# Altium PCB servo.PcbDoc
Units mm, origin at the board's own origin, x right, y up, seen from the top; angles counter-clockwise.
Board outline 152.78 x 100.58 mm, 2 copper layers (Top Layer, Bottom Layer); 35 components, 27 nets, 134 pads, 0 vias.
Unrouted connection lines stored in the file: 4.
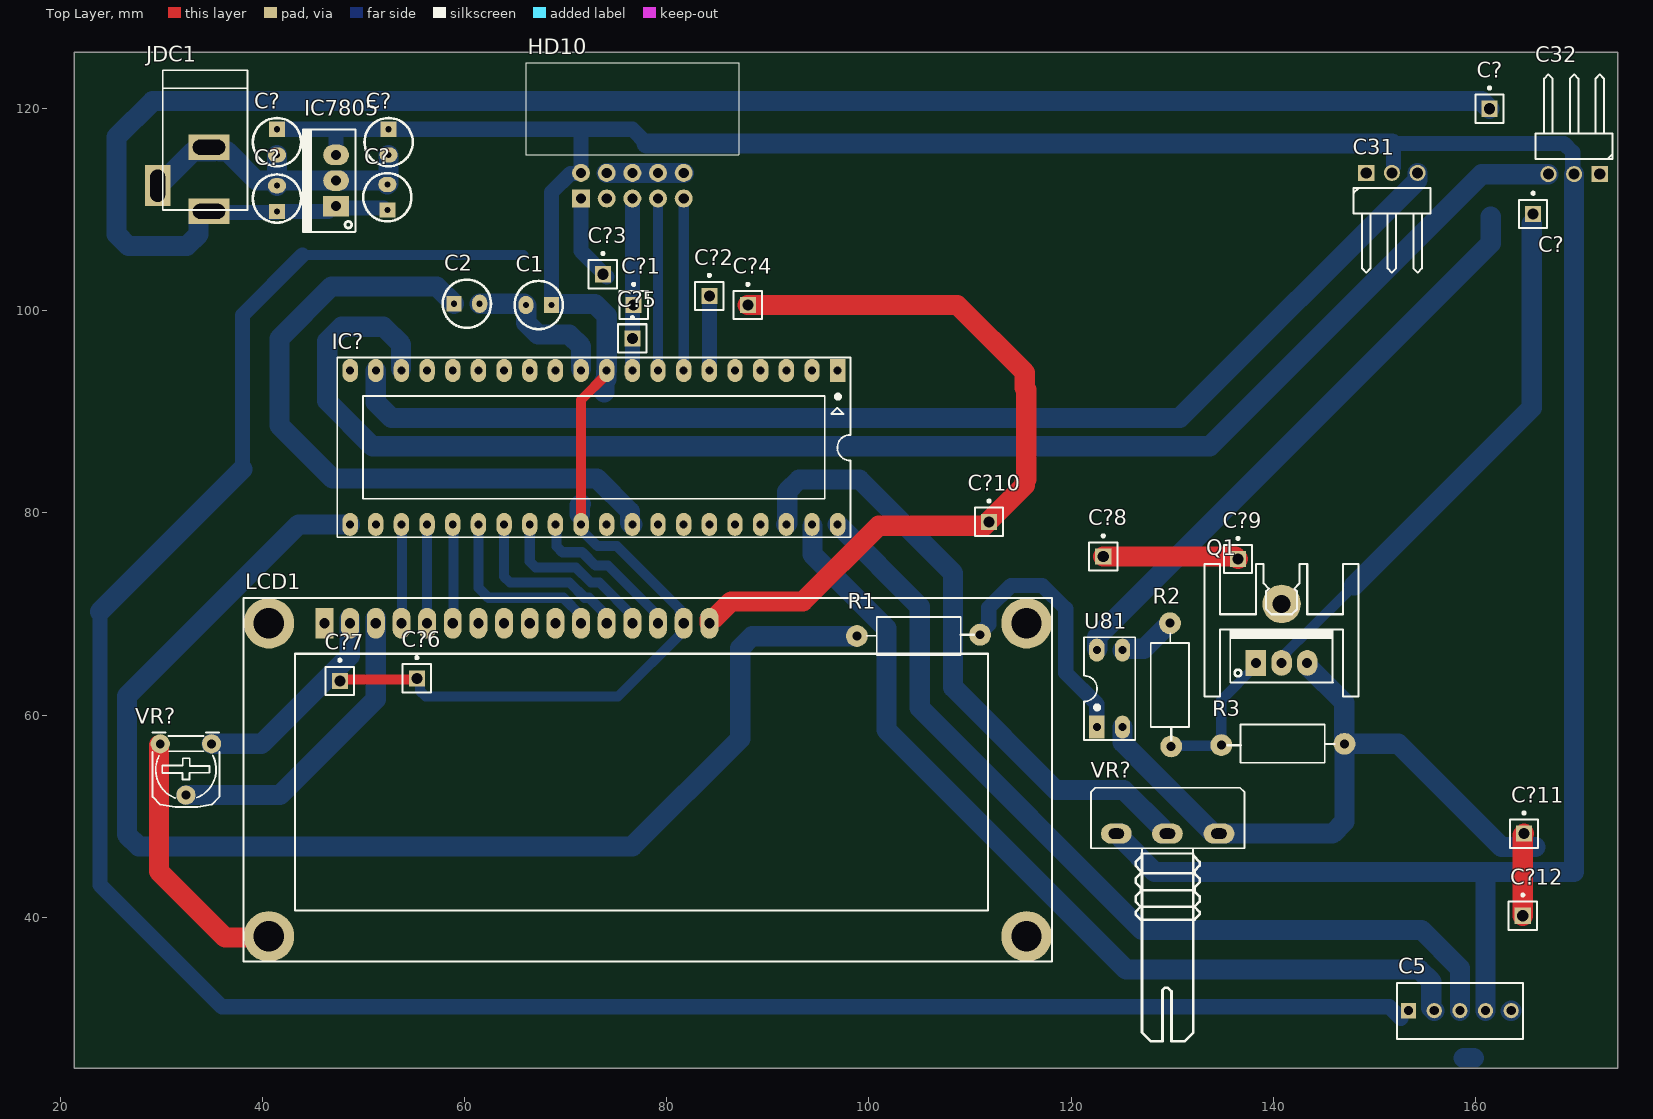
[diagram p0: Top Layer view]
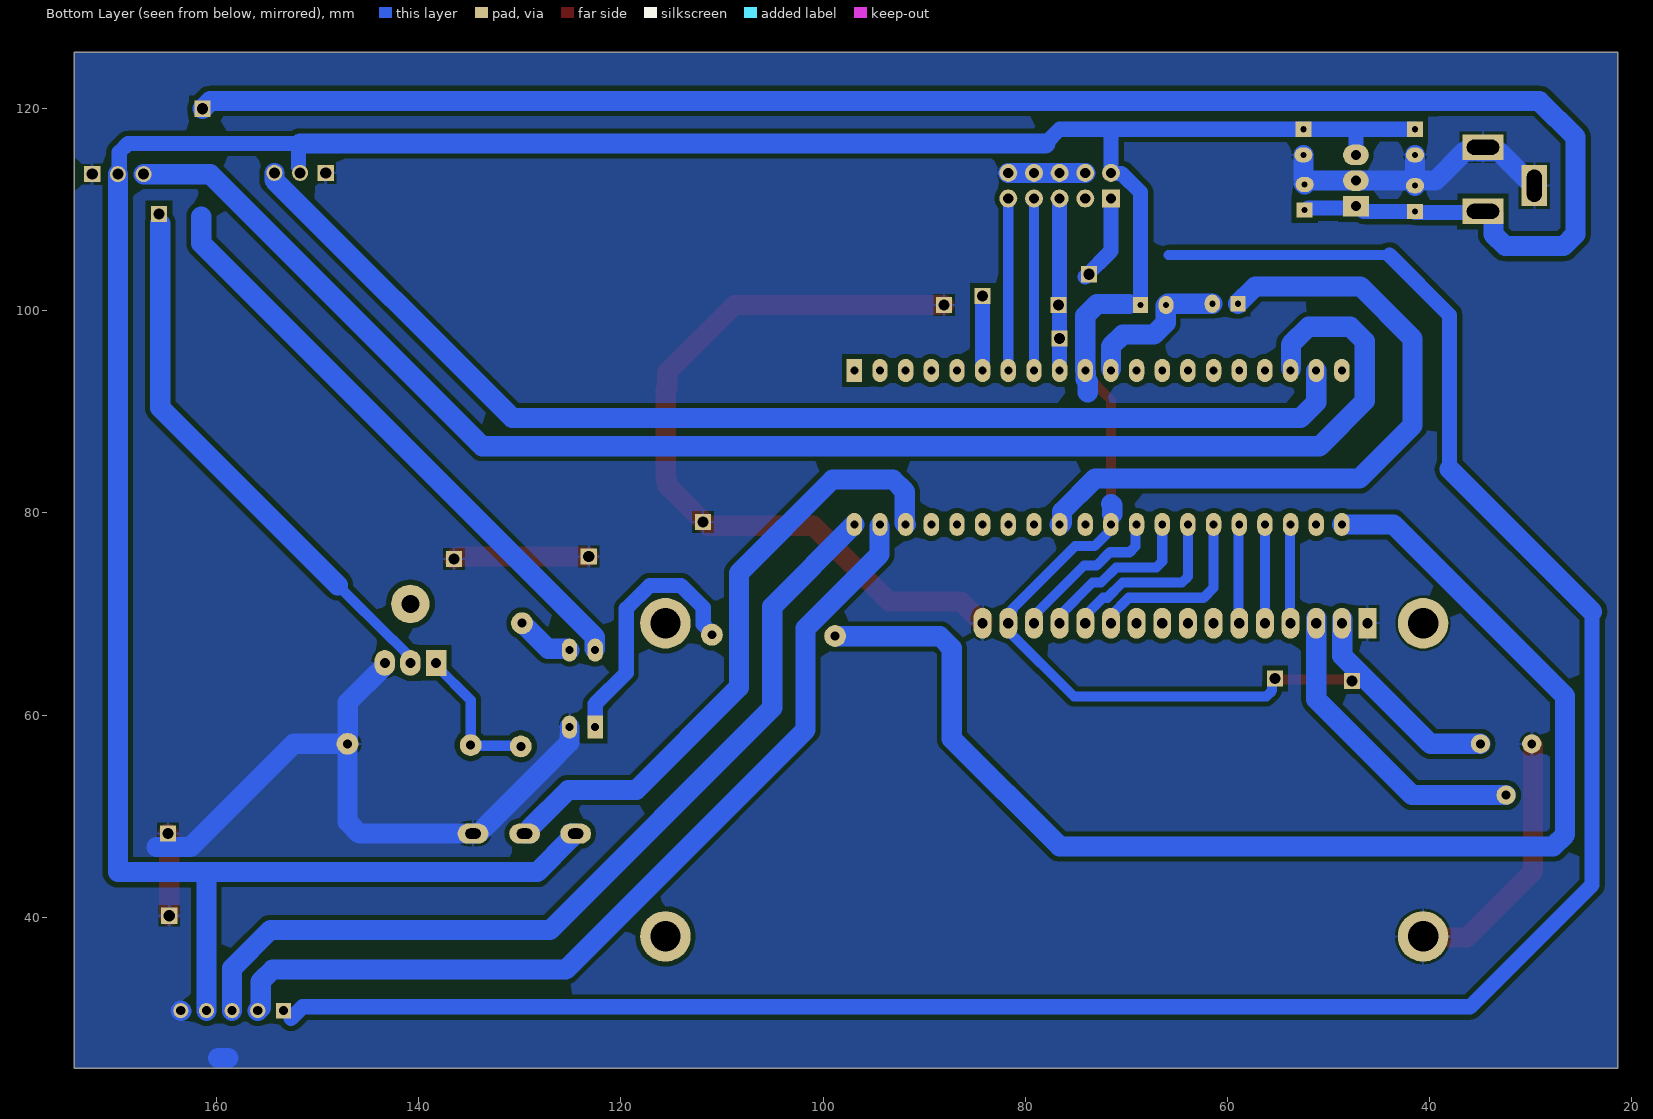
[diagram p1: Bottom Layer view, seen from below]
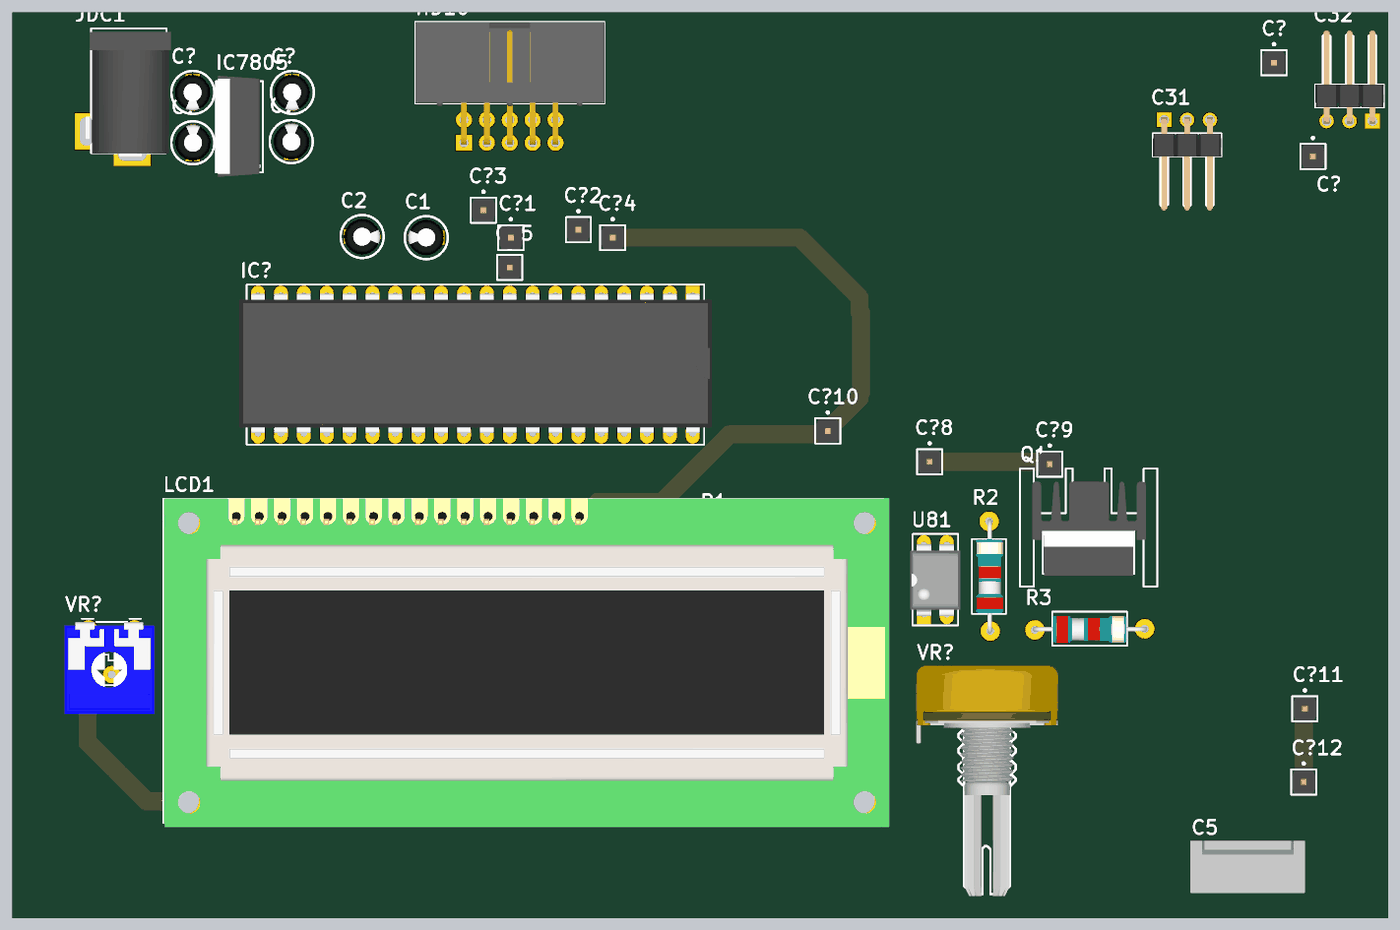
[diagram p2: 3D render of the assembled board from above, using the file's embedded part models]

## Layer stack, top to bottom
Top Solder: solder mask 0.0102, Solder Resist, Dk 3.5
Top Layer: signal copper 0.0356
Dielectric 1: dielectric 0.32, FR-4, Dk 4.8
Bottom Layer: signal copper 0.0356
Bottom Solder: solder mask 0.0102, Solder Resist, Dk 3.5

## Board outline
21.336,25.019 174.117,25.019 174.117,125.603 21.336,125.603

## Design rules (kind name [scope] priority, off if disabled: settings)
Clearance [All] p1: gap=0.5 ignorepadtopadclearanceinfootprint=FALSE
PolygonConnect [All] p1: connectstyle=Relief reliefconductorwidth=0.254 reliefentries=4 polygonreliefangle="90 Angle" airgapwidth=0.254
RoutingCorners [All] p1: cornerstyle=Round minsetback=2.54 maxsetback=2.54
RoutingVias [All] p1: holewidth=0.711 width=1.27 viastyle="Through Hole" minholewidth=0.711 minwidth=1.27 maxholewidth=0.711 maxwidth=1.27
ShortCircuit [All] p1: allowed=TRUE
SolderMaskExpansion [All] p1: expansion=0.102 istentingtop=FALSE
UnRoutedNet [All] p1: checkbadconnections=TRUE
Width [All] p1: maxlimit=5 minlimit=0.5 preferedwidth=0.7
27 further rules are at their usual default settings.

## Classes and differential pairs
component class servo: C1 C2 C5 C31 C32 C? HD10 IC7805 IC? JDC1 LCD1 Q1 R1 R2 R3 U81 VR?

## Components (designator, comment, footprint, x,y, rotation, side; value= is the part's Value field where it differs from the comment)
C1 "CN-ALU-DIP" CA-ALU-2.54 67.31,100.584 r180 top value=104
C2 "CN-ALU-DIP" CA-ALU-2.54 60.198,100.711 r0 top value=104
C5 "Header5" HDR5 153.416,30.734 r0 top
C31 "JP3" JP3-D1C 155.575,111.125 r0 top
C32 "JP3" JP3-D1C 165.989,116.078 r180 top
C? "CN-ALU-DIP" CA-ALU-2.54 52.324,111.252 r90 top value=104
C? "CN-ALU-DIP" CA-ALU-2.54 52.451,116.713 r270 top value=104
C? "JP1" JP1-D1T 165.735,109.601 r0 top
C? "JP1" JP1-D1T 161.417,120.015 r0 top
C? "CN-ALU-DIP" CA-ALU-2.54 41.402,111.125 r90 top value=104
C? "CN-ALU-DIP" CA-ALU-2.54 41.402,116.713 r270 top value=104
C?1 "JP1" JP1-D1T 76.708,100.584 r0 top (schematic designator C?)
C?2 "JP1" JP1-D1T 84.201,101.473 r0 top (schematic designator C?)
C?3 "JP1" JP1-D1T 73.66,103.632 r0 top (schematic designator C?)
C?4 "JP1" JP1-D1T 88.011,100.584 r0 top (schematic designator C?)
C?5 "JP1" JP1-D1T 76.581,97.282 r0 top (schematic designator C?)
C?6 "JP1" JP1-D1T 55.245,63.627 r0 top (schematic designator C?)
C?7 "JP1" JP1-D1T 47.625,63.373 r0 top (schematic designator C?)
C?8 "JP1" JP1-D1T 123.19,75.692 r0 top (schematic designator C?)
C?9 "JP1" JP1-D1T 136.525,75.438 r0 top (schematic designator C?)
C?10 "JP1" JP1-D1T 111.887,79.121 r0 top (schematic designator C?)
C?11 "JP1" JP1-D1T 164.846,48.26 r0 top (schematic designator C?)
C?12 "JP1" JP1-D1T 164.719,40.132 r0 top (schematic designator C?)
HD10 "IDC 5x2" IDC10-BH 76.581,116.078 r0 top value="Header 5x2"
IC7805 "LM7805" QTO-220 47.244,110.363 r90 top
IC? "ATMEL 16A" DIP40/W0.6 96.901,94.107 r180 top value="Atmega 16L"
JDC1 "Jac DC" DC-IN 32.131,113.03 r270 top
LCD1 "LCD 16x2A" LCD16X2 46.101,69.088 r0 top value=LCD16x2A
Q1 "IRF840" TO220H1 140.843,65.151 r0 top
R1 "300" RES-1/2W 105.41,67.818 r180 top
R2 "300" RES-1/2W 129.794,62.484 r90 top
R3 "4k7" RES-1/2W 140.462,57.15 r0 top
U81 "PC817" DIP4 122.555,58.801 r0 top
VR? "50K" VR-S2 34.925,57.15 r180 top value="Volume 50k"
VR? "50K" VR-S1 129.565,48.26 r0 top value="Volume 50k"

## Footprints (in the part's own frame and the unit in brackets; to place one, negate y for a bottom-side part, rotate by r counter-clockwise, add the part's x,y. Pads: shape width x height; smd on the part's side, far side on the other; paste and mask are expansions set on the pad)
CA-ALU-2.54 [mm]
  rect 1.5x1.58 hole 0.6: 1(-1.27,0)
  oval 1.5x1.8 hole 0.6: 2(1.27,0)
  silkscreen extent -2.39,-2.39 2.39,2.39, body extent -2,-2.03 1.99,1.97, height 7.01
DC-IN [mm] "Jac DC input"
  rect 2.54x4.064 hole 1.5 slot 3.2 at 90 deg: 1(3.175,2.54) 2(-3.175,2.54)
  rect 4.064x2.54 hole 1.5 slot 3.2 at 0 deg: 3(0.635,-2.54)
  silkscreen extent -10.8,-2.03 3.05,6.35, body extent -10.42,-2.67 3.4,6.84, height 11.02
DIP4 [mil]
  rect 60x90 hole 31: 1(0,0)
  oval 60x90 hole 31: 2(100,0) 3(100,300) 4(0,300)
  silkscreen extent -50,-50 150,350, body extent -59,-10 159,305, height 170
DIP40/W0.6 [mil] "40 PIN, W 600mil, Pin to pin 100mil"
  rect 60x90 hole 31: 1(0,0)
  oval 60x90 hole 31: 2(100,0) 3(200,0) 4(300,0) 5(400,0) 6(500,0) 7(600,0) 8(700,0) 9(800,0) 10(900,0) 11(1000,0) 12(1100,0) 13(1200,0) 14(1300,0) 15(1400,0) 16(1500,0) 17(1600,0) 18(1700,0) 19(1800,0) 20(1900,0) 21(1900,600) 22(1800,600) 23(1700,600) 24(1600,600) 25(1500,600) 26(1400,600) 27(1300,600) 28(1200,600) 29(1100,600) 30(1000,600) 31(900,600) 32(800,600) 33(700,600) 34(600,600) 35(500,600) 36(400,600) 37(300,600) 38(200,600) 39(100,600) 40(0,600)
  silkscreen extent -50,-50 1950,650, body extent -82,-10 1982,600, height 224
HDR5 [mm] "Connector; Header; 5 Position"
  rect 1.5x1.5 hole 0.9: 1(0,0)
  round 1.5 hole 0.9: 2(2.54,0) 3(5.08,0) 4(7.62,0) 5(10.16,0)
  silkscreen extent -1.14,-2.79 11.3,2.74, body extent -1.27,-2.92 11.43,2.88, height 11.72
IDC10-BH [mil]
  rect 70x70 hole 40: 1(-200,-195)
  round 70 hole 40: 2(-200,-95) 3(-100,-195) 4(-100,-95) 5(0,-195) 6(0,-95) 7(100,-195) 8(100,-95) 9(200,-195) 10(200,-95)
  silkscreen extent -415,-25 415,335, body extent -412,-204 412,330, height 354
JP1-D1T [mm] "1pins, 1 row, straight, gold plating"
  rect 1.6x1.6 hole 1.1: 1(0,0)
  silkscreen extent -1.4,-1.4 1.4,2.17, body extent -1.27,-1.27 1.27,1.27, height 8.54
JP3-D1C [mm] "3 pins, 1 row, right angled, gold plating"
  rect 1.6x1.6 hole 1.1: 1(-6.35,2.54)
  round 1.6 hole 1.1: 2(-3.81,2.54) 3(-1.27,2.54)
  silkscreen extent -7.62,-7.34 0,1.04, body extent -7.62,-7.52 0,2.84, height 2.55
LCD16X2 [mm] "LCD dipslay 16x2, 16 pin"
  round 5 hole 3: 1(-5.5,-31) 1(-5.5,0) 1(69.5,-31) 1(69.5,0)
  rect 1.778x3.048 hole 1: 1(0,0)
  oval 1.778x3.048 hole 1: 2(2.54,0) 3(5.08,0) 4(7.62,0) 5(10.16,0) 6(12.7,0) 7(15.24,0) 8(17.78,0) 9(20.32,0) 10(22.86,0) 11(25.4,0) 12(27.94,0) 13(30.48,0) 14(33.02,0) 15(35.56,0) 16(38.1,0)
  round 0 all layers, no hole: ""(-5.5,0)
  silkscreen extent -8,-33.5 72,2.5, body extent -7.87,-33.96 72.64,2.54, height 18.14
QTO-220 [mil] "TO-220 - 1-2-3"
  rect 80x100 hole 39: 1(0,0)
  oval 80x100 hole 39: 2(100,0) 3(200,0)
  silkscreen extent -100,-76 300,130, body extent -119,-64 322,121, height 755
RES-1/2W [mil]
  round 85 hole 35: 1(-220,-5) 2(260,0)
  silkscreen extent -195,-74 221,75, body extent -230,-60 270,56, height 121
TO220H1 [mil] "TO-220 - 1-2-3"
  round 150 hole 70: 0(0,230)
  rect 80x100 hole 39: 1(-100,0)
  oval 80x100 hole 39: 2(0,0) 3(100,0)
  silkscreen extent -300,-130 300,385, body extent -246,-82 250,329, height 1000
VR-S1 [mil]
  oval 120x78.74 hole 40 slot 60 at 0 deg: 1(-200,0) 2(-1,0) 3(200,0)
  silkscreen extent -299,-810 300,179, body extent -310,-818 310,188, height 839
VR-S2 [mil] "Resistor Variable"
  round 75 hole 35: 1(0,0) 2(100,200) 3(200,0)
  silkscreen extent -31,-44 231,246, body extent -87,-30 307,372, height 165

## Part data
C1 C2 C? C? C? C?: "Capacitor (Semiconductor SIM Model)", LatestRevisionDate=17-Jul-2002, LatestRevisionNote="Re-released for DXP Platform.", PackageReference=C1206, Publisher="Altium Limited"
C5: "Header IDC, 5 x 1 Pin Vertical 2.54mm Pitch (Non-Boxed, Male)", Manufacturer="W¨¹rth Elektronik eiSos GmbH", partNo=613002143121, ComponentLink1 Description=Manufacturer, ComponentLink1URL=http://www.we-online.com, ComponentLink2 Description=Datasheet, ComponentLink2URL=http://katalog.we-online.de/em/datasheet/6130xx143121.pdf, Created by="Karrer Zheng", Created Date="29 March 2013", NoPins=02
C31 C32: "WR-PHD 2.54 mm Angled Socket Header", Manufacturer="W¨¹rth Elektronik eiSos GmbH", partNo=613003143121, ComponentLink1 Description=Manufacturer, ComponentLink1URL=http://www.we-online.com, ComponentLink2 Description=Datasheet, ComponentLink2URL=http://katalog.we-online.de/em/datasheet/6130xx143121.pdf, Created by="Karrer Zheng", Created Date="29 March 2013", NoPins=03
C? C? C?1 C?2 C?3 C?4 C?5 C?6 C?7 C?8 C?9 C?10 C?11 C?12: "WR-PHD 2.54 mm Angled Socket Header", Manufacturer="W¨¹rth Elektronik eiSos GmbH", partNo=613002143121, ComponentLink1 Description=Manufacturer, ComponentLink1URL=http://www.we-online.com, ComponentLink2 Description=Datasheet, ComponentLink2URL=http://katalog.we-online.de/em/datasheet/6130xx143121.pdf, Created by="Karrer Zheng", Created Date="29 March 2013", NoPins=02
HD10: library part "IDC 5X2"
IC7805: library part LM78xx, "On ap +, from + 5 to + 24VDC"
IC?: library part ATmega16A-PU, "8-Bit AVR Microcontroller with 16K Bytes of In-System Programmable Flash Memory"
JDC1: library part DCIN, "Jac DC input"
LCD1: library part LCD16x2A, "LCD dipslay 16 char, 2 line"
Q1: "MOSFET N - CHANNEL 500V - 0.75 - 8A - TO-220"
R1 R2 R3: library part Res, "Res", Manufacturer="Generic Components", Class=Passive, Published=08/06/2000, Publisher="Altium Hobart Technology Centre", SubClass=R
U81: "Single Opto"
VR? VR?: library part VR-S, "Var Resistor"

## Nets (pads, with @x,y where several pads share a name; then routed paths per layer and width w, separated by ;. In a path a pad name is that pad's centre, name@x,y a point inside that pad or via, vN(x,y) a via of type N, cw(c..) or ccw(c..) an arc to the next point about the centre after c; other vN are vias at no path point)
+12: C?.1@41.402,109.855 C?.1@52.324,109.982 C?.1@161.417,120.015 IC7805.1 JDC1.1 U81.4 | length 236.2
  Bottom Layer w1: IC7805.1 IC7805.1@47.434,110.172 ; C?.1@52.324,109.855 52.284,109.855 51.967,110.172 52.133,110.172 C?.1@52.324,109.982
  Bottom Layer w1.5: JDC1.1@35.433,109.728 C?.1@41.402,109.728 ; C?.1@41.402,109.855 41.881,109.855 46.482,109.855 46.724,110.097 46.978,110.097 IC7805.1 ; IC7805.1@47.434,110.172 C?.1@51.967,110.172
  Bottom Layer w2: JDC1.1 33.909,109.855 33.639,109.585 33.639,107.598 32.467,106.426 26.699,106.426 25.527,107.598 25.527,117.221 29.083,120.777 160.655,120.777 C?.1@161.417,120.015 ; U81.4@122.595,66.564 122.595,67.731 161.544,106.68 161.544,109.347
GND: C5.5 C31.1 C32.1 C?4.1 C?8.1 C?9.1 C?10.1 C?11.1 C?12.1 C?.2 HD10.4 HD10.6 HD10.8 HD10.10 IC7805.2 JDC1.2 JDC1.3 LCD1.1@40.601,38.088 LCD1.1@40.601,69.088 LCD1.1@46.101,69.088 LCD1.16 Q1.3 R3.2 U81.2 VR?.3 | length 235.3
  Top Layer w2: VR?.3@29.718,57.023 29.718,44.533 36.278,37.973 LCD1.1@40.885,37.973 ; LCD1.16 84.201,69.501 84.312,69.612 84.725,69.612 86.36,71.247 93.472,71.247 100.965,78.74 111.413,78.74 115.411,82.738 115.411,83.185 115.57,83.344 115.57,92.202 115.411,92.361 115.411,93.919 108.746,100.584 C?4.1 ; C?8.1 136.271,75.692 C?9.1 ; C?12.1 164.719,48.133 C?11.1
  Bottom Layer w2: JDC1.3 29.861,113.032 30.355,113.032 33.131,115.808 35.163,115.808 35.163,115.935 35.433,116.078 35.703,115.808 36.465,115.808 39.37,112.903 C?.2@41.402,112.903 ; C?.2@41.402,112.395 C?.2@41.402,112.903 ; C?.2@41.402,115.443 C?.2@41.402,112.903 ; C?.2@52.451,115.443 52.451,112.649 52.324,112.522 51.943,112.903 IC7805.2 C?.2@41.402,112.903 ; HD10.4 HD10.10 ; U81.2 125.095,57.286 127.342,55.04 134.121,48.26 134.645,48.26 145.894,48.26 147.066,49.432 R3.2 ; Q1.3 143.383,64.897 147.042,61.238 147.042,57.174 R3.2 ; 158.877,26.035 159.873,26.035 ; C5.5@163.536,30.694 C5.5 ; 165.989,46.95 162.6,46.95 152.4,57.15 R3.2
NetC1_2: C1.2 C2.2 IC?.11 | length 15
  Bottom Layer w2: C2.2 65.913,100.711 66.08,100.544 66.08,98.835 67.252,97.663 70.329,97.663 71.501,96.491 IC?.11@71.501,94.25
NetC2_1: C2.1 IC?.32 | length 68.4
  Bottom Layer w2: C2.1 57.219,102.42 46.794,102.42 41.656,97.282 41.656,88.646 46.903,83.399 73.089,83.399 76.343,80.145 76.343,79.01 76.486,78.867 IC?.32
NetC5_2: C5.2 IC?.39 | length 90.5
  Bottom Layer w2: IC?.39@94.401,78.724 94.401,75.906 101.727,68.58 101.727,58.547 125.476,34.798 154.494,34.798 155.666,33.626 155.666,31.024 C5.2
NetC5_3: C5.3 IC?.40 | length 89.9
  Bottom Layer w2: IC?.40 105.029,70.739 105.029,60.706 127.017,38.718 154.703,38.718 158.496,34.925 C5.3
NetC31_3: C31.3 IC?.19 | length 117.4
  Bottom Layer w2: IC?.19 51.181,90.961 52.726,89.416 130.769,89.416 154.305,112.952 C31.3
NetC32_3: C32.3 IC?.18 | length 150.8
  Bottom Layer w2: IC?.18@53.681,94.25 53.681,96.687 51.943,98.425 47.805,98.425 46.379,96.999 46.379,91.084 50.849,86.614 133.731,86.614 160.655,113.538 C32.3
NetC?_1: C?.1@165.735,109.601 Q1.2 | length 53.8
  Bottom Layer w1: Q1.2 140.843,65.684 141.367,66.208 141.367,66.24 142.548,67.421 142.605,67.421 148.038,72.854
  Bottom Layer w2: 148.038,72.854 165.608,90.424 165.608,108.645
NetHD10_1: C?1.1 C?2.1 C?3.1 HD10.1 IC?.6 | length 15.9
  Bottom Layer w1.5: HD10.1 71.501,105.918 C?3.1@74.041,103.378 ; IC?.6 C?2.1@84.201,101.219
NetHD10_5: C?5.1 HD10.5 IC?.9 | length 17
  Bottom Layer w1.5: IC?.9 HD10.5
NetHD10_7: HD10.7 IC?.8 | length 17
  Bottom Layer w1: IC?.8 HD10.7
NetHD10_9: HD10.9 IC?.7 | length 17.2
  Bottom Layer w1: HD10.9@81.534,111.252 81.534,111.125 81.661,110.998 IC?.7
NetIC?_21: IC?.21 R1.2 | length 129.5
  Bottom Layer w2: IC?.21 43.561,78.867 26.543,61.849 26.543,48.162 27.715,46.99 76.581,46.99 87.249,57.658 87.249,66.616 88.421,67.788 98.776,67.788 R1.2
NetIC?_23: IC?.23 LCD1.4 | length 9.8
  Bottom Layer w1: IC?.23 53.785,78.803 53.785,69.151 LCD1.4@53.848,69.088
NetIC?_24: IC?.24 LCD1.5 | length 9.8
  Bottom Layer w1: LCD1.5 IC?.24
NetIC?_25: IC?.25 LCD1.6 | length 9.7
  Bottom Layer w1: IC?.25 58.864,78.803 LCD1.6@58.864,69.215
NetIC?_26: IC?.26 LCD1.11 | length 18.3
  Bottom Layer w1: IC?.26 61.341,72.595 62.324,71.612 69.743,71.612 71.501,69.854 LCD1.11
NetIC?_27: IC?.27 LCD1.12 | length 17.7
  Bottom Layer w1: IC?.27 63.881,73.698 64.467,73.112 70.365,73.112 71.865,71.612 72.283,71.612 74.041,69.854 LCD1.12
NetIC?_28: IC?.28 LCD1.13 | length 16.8
  Bottom Layer w1: IC?.28 66.421,75.198 67.007,74.612 70.986,74.612 72.486,73.112 73.323,73.112 76.581,69.854 LCD1.13
NetIC?_29: IC?.29 LCD1.14 | length 15.9
  Bottom Layer w1: IC?.29 69.061,78.767 69.061,76.698 69.647,76.112 71.607,76.112 72.916,74.803 74.172,74.803 79.121,69.854 LCD1.14
NetIC?_38: IC?.38 VR?.2@129.54,48.26 | length 62.9
  Bottom Layer w2: IC?.38 91.901,78.947 91.901,82.14 93.073,83.312 99.06,83.312 108.331,74.041 108.331,62.738 118.491,52.578 125.222,52.578 129.016,48.784 129.016,48.26 VR?.2@129.54,48.26
NetLCD1_3: LCD1.3 VR?.2@32.385,52.07 | length 30.8
  Bottom Layer w2: VR?.2@32.385,52.07 41.693,52.07 51.181,61.558 LCD1.3@51.181,69.596
NetQ1_1: Q1.1 R2.1 R3.1 | length 14.6
  Bottom Layer w1: R2.1 129.984,56.959 134.81,56.959 R3.1 134.874,61.468 138.303,64.897 Q1.1
NetR1_1: R1.1 U81.1 | length 25.5
  Bottom Layer w1.5: R1.1 110.998,68.123 111.851,68.976 111.851,70.641 114.048,72.838 117.154,72.838 119.478,70.514 119.478,64.164 122.555,61.087 U81.1
NetR2_2: R2.2 U81.3 | length 5.8
  Bottom Layer w2: U81.3 125.238,66.564 127.227,66.564 129.751,69.088 R2.2
VCC: C1.1 C5.4 C31.2 C32.2 C?6.1 C?7.1 C?.1@41.402,117.983 C?.1@52.451,117.983 HD10.2 IC7805.3 IC?.10 IC?.30 LCD1.2 LCD1.15 VR?.1 | length 393.9
  Top Layer w1: C?7.1 47.752,63.5 55.118,63.5 C?6.1 ; IC?.30 71.501,91.186 74.041,93.726 IC?.10
  Bottom Layer w1: 46.419,63.691 46.436,63.673 47.325,63.673 C?7.1 ; C?6.1 55.545,63.327 55.545,62.413 56.131,61.827 75.166,61.827 81.661,68.322 LCD1.15 81.661,69.934 81.272,70.323 81.272,70.493 75.041,76.724 73.117,76.724 71.763,78.078 71.763,78.082 71.501,78.344 IC?.30 71.401,78.967 71.401,79.856 IC?.30@71.374,79.883 ; 73.787,91.789 73.787,91.916 73.941,92.07 ; C31.2 151.88,113.78 151.88,114.204 C31.2@151.93,114.254 ; 151.93,116.421 152.095,116.586
  Bottom Layer w1.5: C?.1@41.402,117.983 47.117,117.983 ; IC7805.3@46.99,115.443 IC7805.3 47.244,117.856 47.117,117.983 ; C1.1 68.58,111.75 70.442,113.612 71.448,113.612 HD10.2 71.501,117.983 ; 77.978,116.586 76.581,117.983 71.501,117.983 ; C31.2@151.93,114.254 151.93,116.421 ; 152.095,116.586 168.793,116.586 169.672,115.707 169.672,113.692 C32.2@169.799,113.565 ; 47.117,117.983 52.451,117.983 71.501,117.983
  Bottom Layer w2: VR?.1@34.925,57.15 39.878,57.15 46.419,63.691 48.601,65.873 LCD1.2@48.601,69.556 ; 69.736,100.698 72.869,100.698 74.041,99.526 IC?.10 ; IC?.30@71.374,79.883 71.374,80.772 71.501,80.899 ; 73.787,91.916 73.787,93 74.001,93.214 IC?.10@74.001,93.964 ; 77.978,116.586 151.765,116.586 151.93,116.421 ; VR?.1@124.485,48.26 125.009,48.26 125.009,47.736 128.295,44.45 161.036,44.45 ; C5.4 161.036,44.45 ; C32.2@169.799,113.565 169.799,44.45 161.036,44.45
pads on no net: C5.1 HD10.3 IC?.1 IC?.2 IC?.3 IC?.4 IC?.5 IC?.12 IC?.13 IC?.14 IC?.15 IC?.16 IC?.17 IC?.20 IC?.22 IC?.31 IC?.33 IC?.34 IC?.35 IC?.36 IC?.37 LCD1. LCD1.1@115.601,38.088 LCD1.1@115.601,69.088 LCD1.7 LCD1.8 LCD1.9 LCD1.10 Q1.0
copper on no net: | length 227.8
  Bottom Layer w1: 43.942,105.537 65.792,105.537 ; 152.654,29.972 153.416,30.734
  Bottom Layer w1.5: 23.876,70.231 23.876,43.18 35.941,31.115 151.511,31.115 152.654,29.972 ; 37.973,84.328 37.973,99.568 43.942,105.537
  Bottom Layer w2: 23.876,70.231 37.973,84.328

## Polygon pours and split planes (outlines as drawn)
GND on Bottom Layer "GND_L02_P000" (solid, pour order 0): 21.336,125.603 174.117,125.603 174.117,25.019 21.336,25.019
no net on Layer0 "Default Coverlay 1 Top" (split plane): 21.336,25.019 174.117,25.019 174.117,125.603 21.336,125.603
no net on Layer0 "Default Coverlay 1 Bottom" (split plane): 21.336,25.019 174.117,25.019 174.117,125.603 21.336,125.603